# Altium PCB PowerSupply_REV1A.PcbDoc
Units mil, origin at the board's own origin, x right, y up, seen from the top; angles counter-clockwise.
Board outline 3935.5 x 3935.84 mil, 4 copper layers (SIG1, GND, PWR, SIG2), stack 78.468 mil thick; 61 components, 50 nets, 210 pads, 124 vias.
Unrouted connection lines stored in the file: 31.
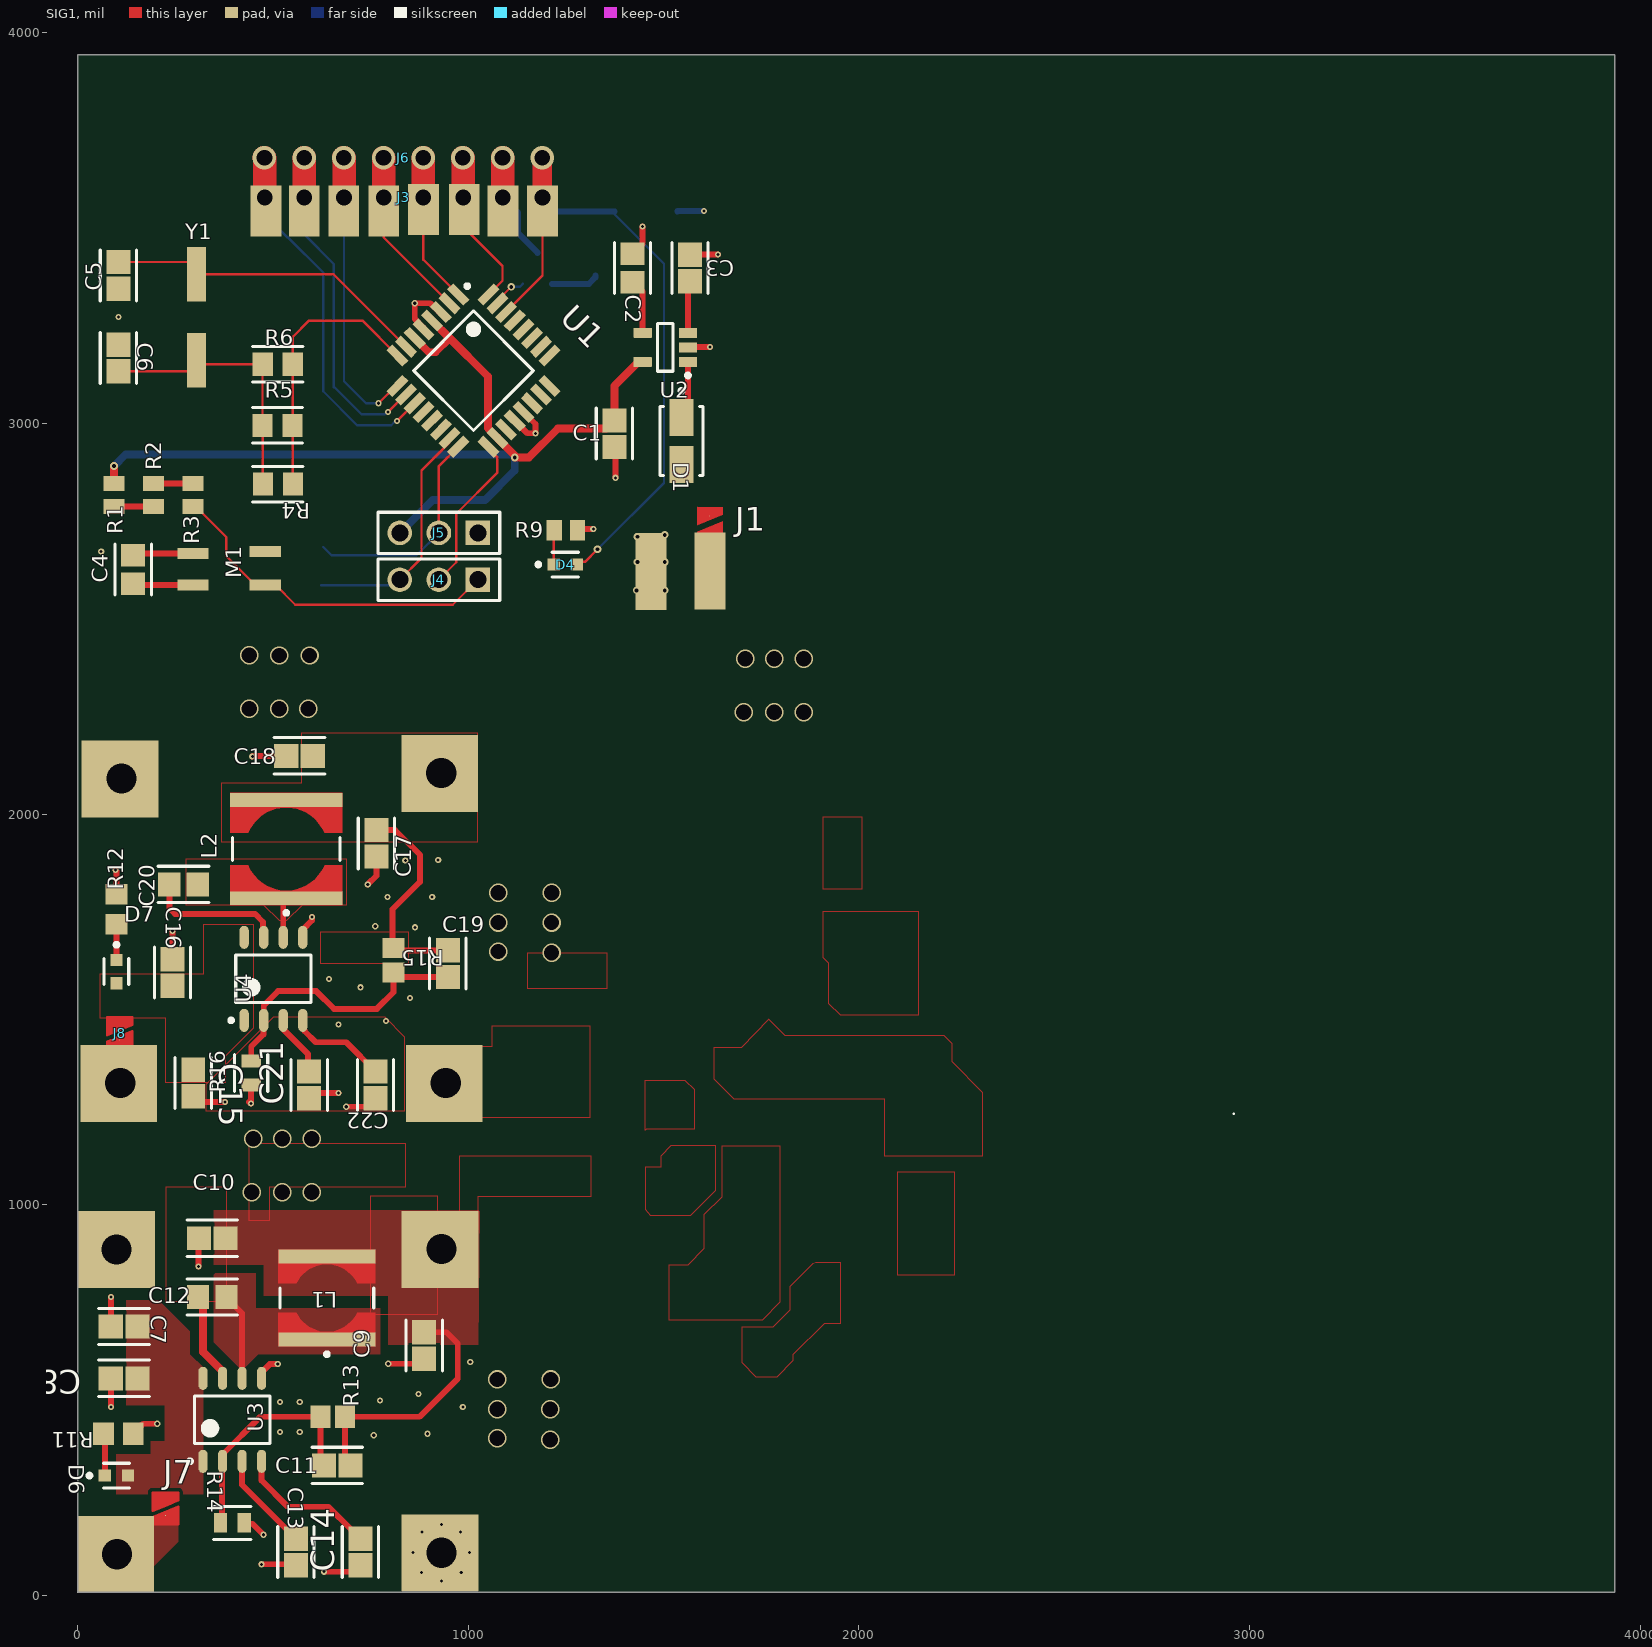
[diagram p0: SIG1 view]
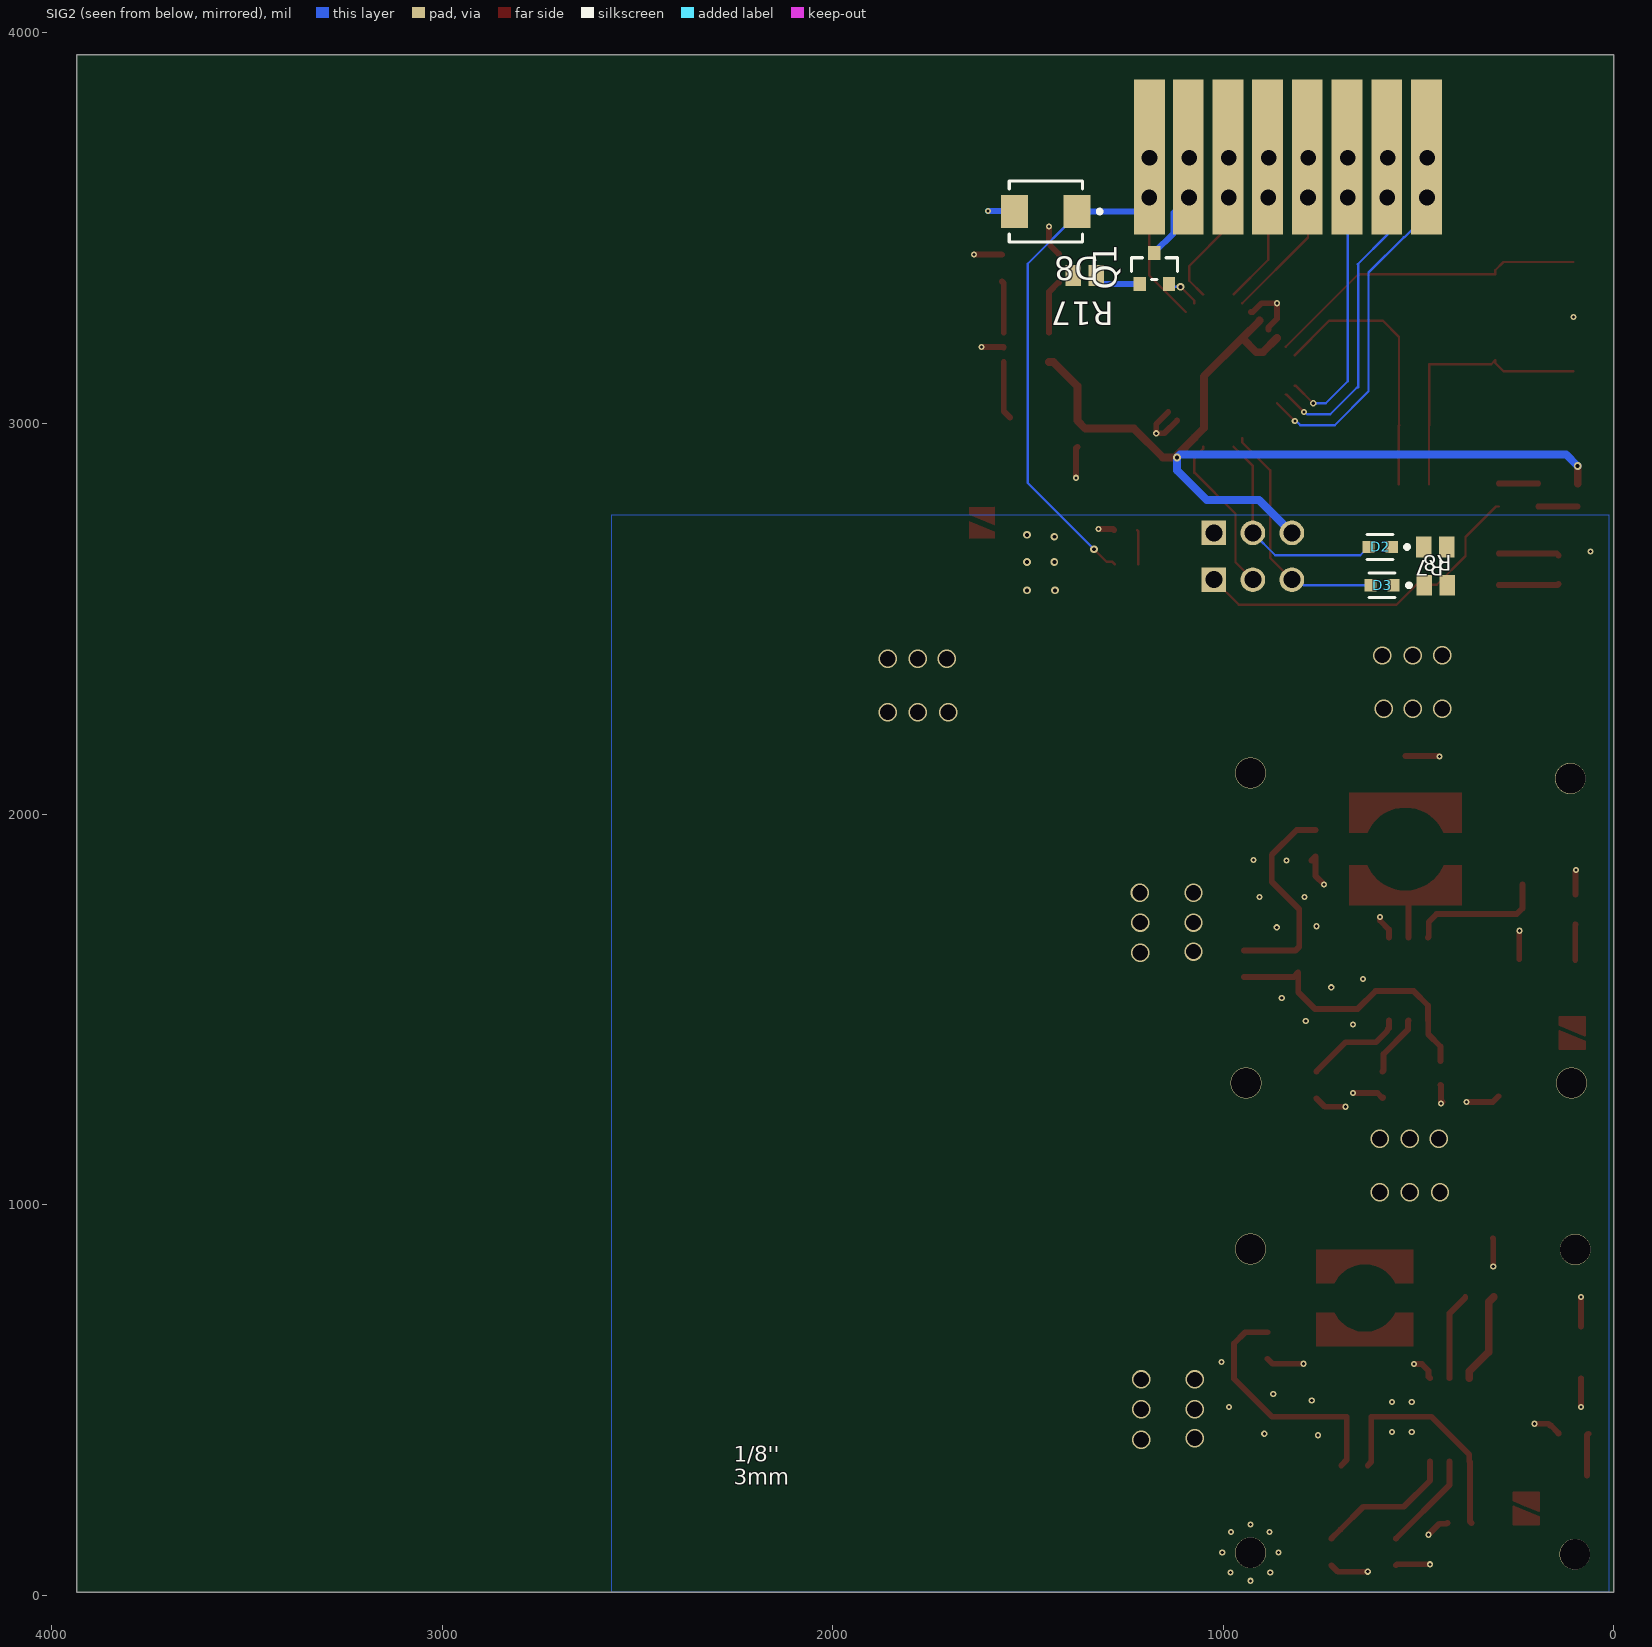
[diagram p1: SIG2 view, seen from below]
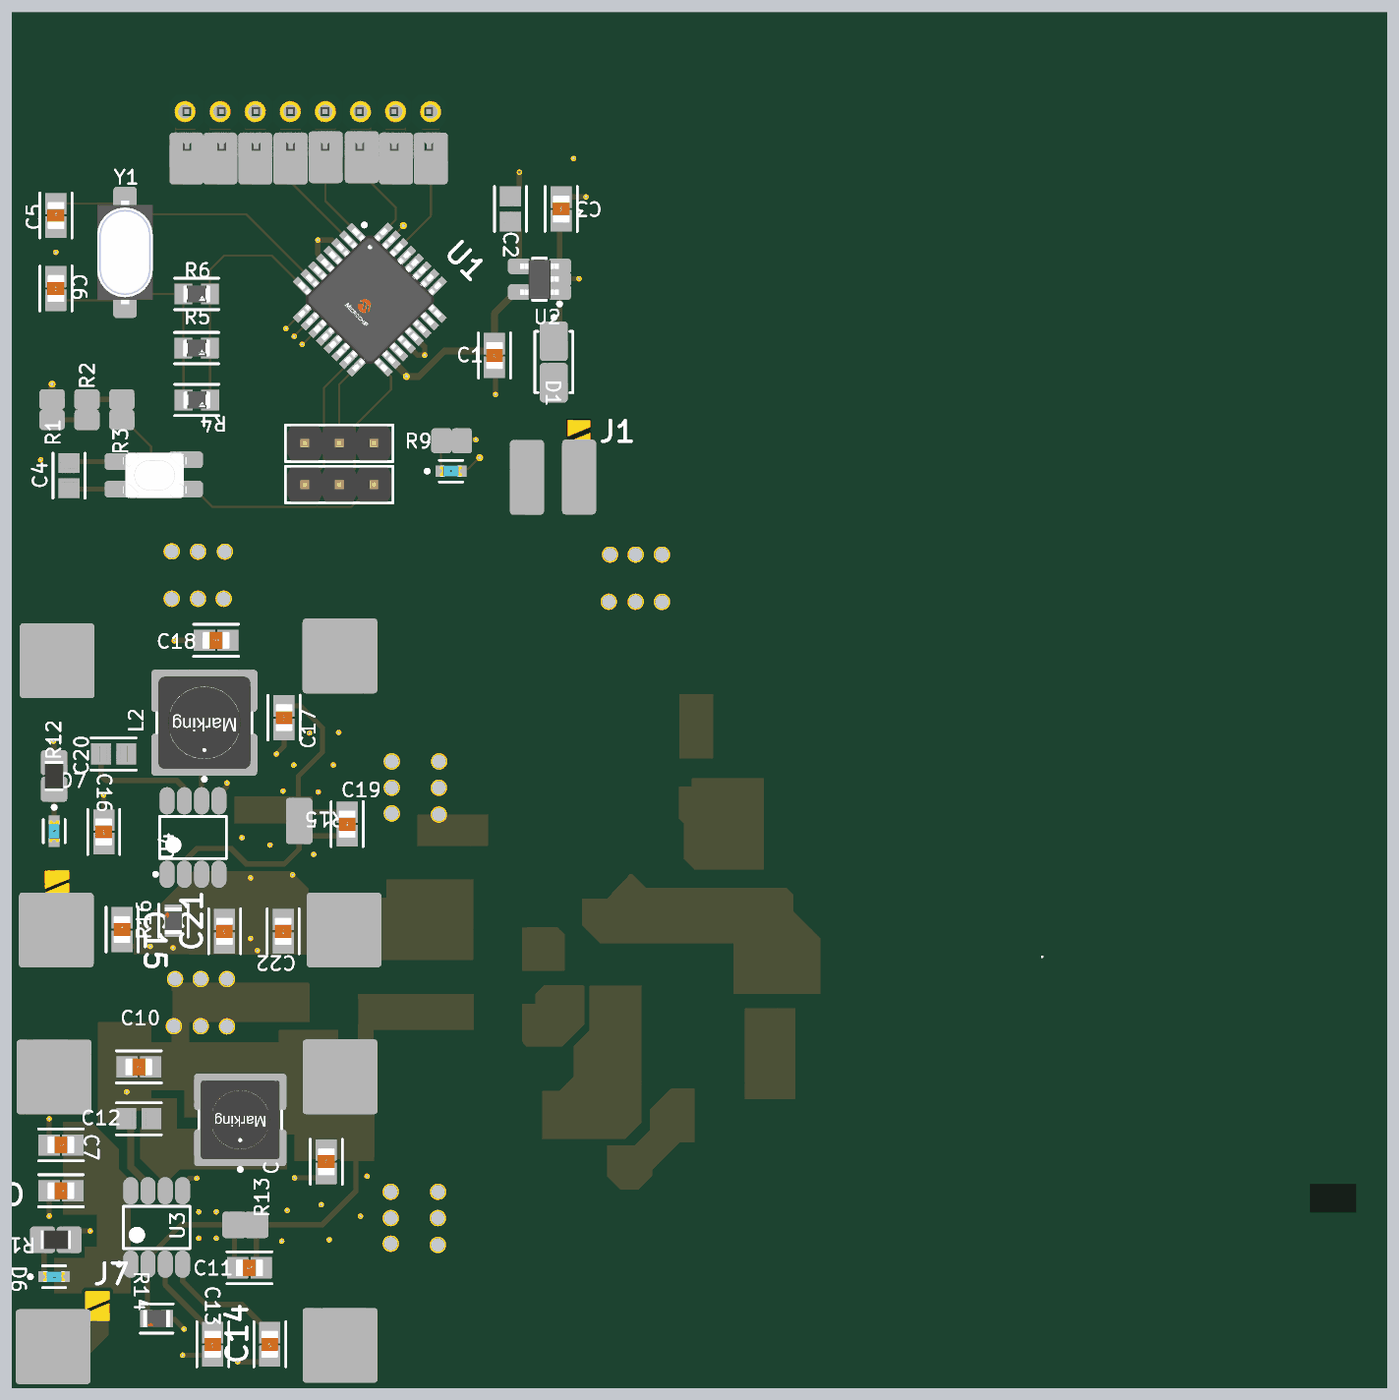
[diagram p2: 3D render of the assembled board from above, using the file's embedded part models]
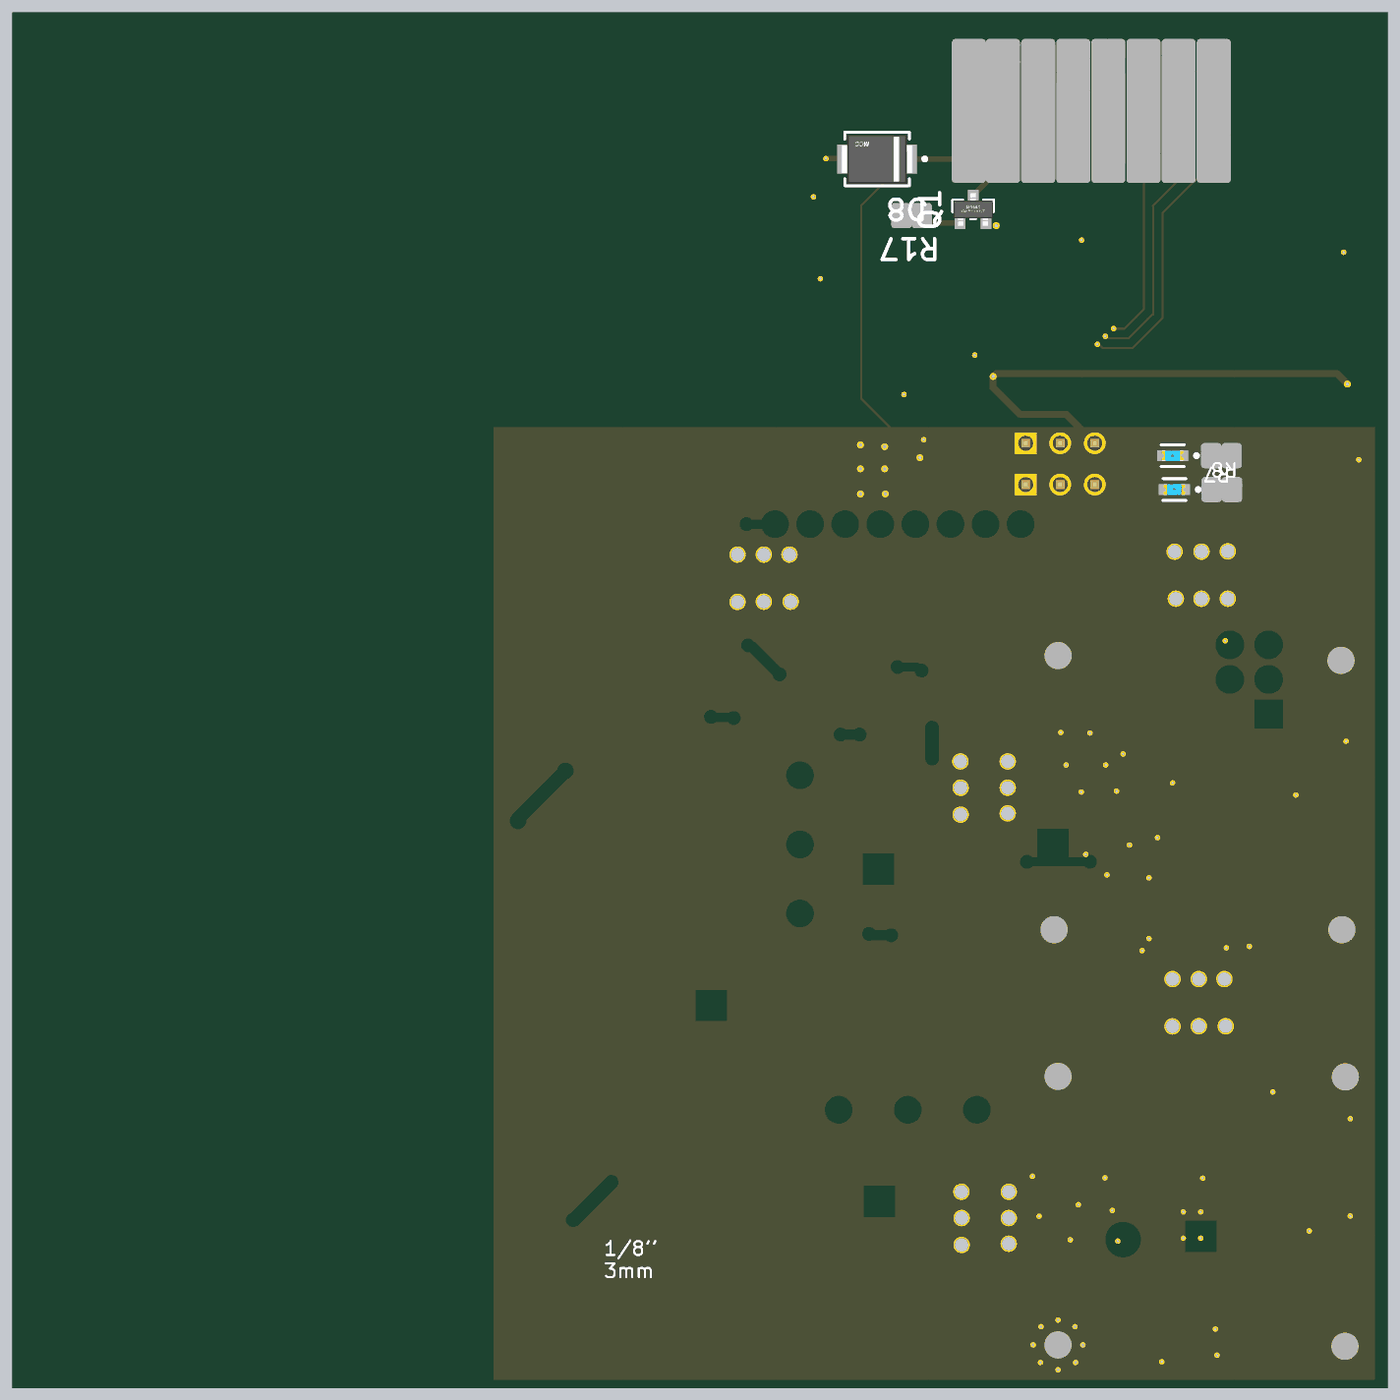
[diagram p3: 3D render of the assembled board from below, using the file's embedded part models]

## Layer stack, top to bottom
Top Solder: solder mask 0.5, Solder Resist, Dk 3.3
SIG1: signal copper 1.378
Dielectric 1: prepreg 2.8, PP-006, Dk 4.1
GND: signal copper 2.756
Dielectric 2: prepreg 2.8, PP-006, Dk 4.1
Dielectric1: core 59, FR-4, Dk 4.3
Dielectric 3: prepreg 2.8, PP-006, Dk 4.1
PWR: signal copper 2.756
Dielectric 4: prepreg 2.8, PP-006, Dk 4.1
SIG2: signal copper 1.378
Bottom Solder: solder mask 0.5, Solder Resist, Dk 3.3

## Board outline
0,8 0,3943.84 3935.5,3943.84 3935.5,8

## Design rules (kind name [scope] priority, off if disabled: settings)
Clearance [All] p1: gap=10 ignorepadtopadclearanceinfootprint=TRUE except(3.54: Arc-Arc Arc-Track Track-Track SMDPad-SMDPad; 5: Arc-SMDPad Track-SMDPad; 5.91: SMDPad-Text THPad-Text; 39.37: SMDPad-THPad THPad-THPad)
ComponentClearance FootprintClearance [HasFootprint('RESC1608X10N') vs HasFootprint('RESC1608X10N')] p1: gap=0 collisioncheckmode=3 verticalgap=1 showdistances=FALSE donotcheckwithout3dbody=TRUE
DiffPairsRouting [All] p1: maxlimit=50 minlimit=10 mostfreqgap=20 toplayer_minwidth=10 toplayer_maxwidth=10 toplayer_prefwidth=10 midlayer1_minwidth=10 midlayer1_maxwidth=10 midlayer1_prefwidth=10 midlayer2_minwidth=10 midlayer2_maxwidth=10 midlayer2_prefwidth=10 bottomlayer_minwidth=10 bottomlayer_maxwidth=10 bottomlayer_prefwidth=10 maxuncoupledlength=500
HoleSize [All] p1: absolutevalues=TRUE maxlimit=248.03 minlimit=7.87 maxpercent=80.000 minpercent=20.000
HoleToHoleClearance [All] p1: gap=20 allowstackedmicrovias=TRUE
MinimumAnnularRing [All] p1: minimumring=7.87
PasteMaskExpansion [All] p1: expansion=10
PlaneClearance [All] p1: clearance=15
PolygonConnect [All] p1: connectstyle=Direct reliefconductorwidth=19.68 reliefentries=4 polygonreliefangle="45 Angle" airgapwidth=19.68
RoutingVias [All] p1: holewidth=10 width=20 viastyle="Through Hole" minholewidth=10 minwidth=20 maxholewidth=10 maxwidth=20
SMDNeckDown [All] p1: percent=100.000
SilkToSolderMaskClearance SilkscreenOverComponentPads [IsPad] p1: minsilkscreentomaskgap=5.91 clearancetoexposedcopper=TRUE
SolderMaskExpansion [HasFootprint('No Footprint')] p1: expansion=1 istentingtop=FALSE
Width Width_1 [All] p1: maxlimit=80 minlimit=6 preferedwidth=20
23 further rules are at their usual default settings.

## Classes and differential pairs
component class Power_Distribution: C7 C8 C9 C10 C11 C12 C13 C14 C15 C16 C17 C18 C19 C20 C21 C22 D6 D7 J7 J8 L1 L2 R11 R12 R13 R14 R15 R16 U3 U4
component class uC_Environment: C1 C2 C3 C4 C5 C6 D1 D2 D3 D4 D8 J1 J3 J4 J5 M1 Q1 R1 R2 R3 R4 R5 R6 R7 R8 R9 R17 U1 U2 Y1

## Components (designator, comment, footprint, x,y, rotation, side; value= is the part's Value field where it differs from the comment)
C1 "C2012X5R1V226M125AC" FP-C2012-125-0_2-IPC_A 1374,2974 r270 top
C2 "CL21B104KBCNNNC" FP-CL21-IPC_A 1420.21,3397.98 r270 top
C3 "C2012X5R1V226M125AC" FP-C2012-125-0_2-IPC_A 1567.31,3397.98 r90 top
C4 "CL21B104KBCNNNC" FP-CL21-IPC_A 142,2626 r270 top
C5 "C2012X5R1V226M125AC" FP-C2012-125-0_2-IPC_A 104.08,3379.37 r270 top
C6 "C2012X5R1V226M125AC" FP-C2012-125-0_2-IPC_A 104.08,3168.01 r90 top
C7 "C2012X5R1V226M125AC" FP-C2012-125-0_2-IPC_A 118.75,688.28 r180 top
C8 "C2012X5R1V226M125AC" FP-C2012-125-0_2-IPC_A 118.75,555.48 r180 top
C9 "C2012X5R1V226M125AC" FP-C2012-125-0_2-IPC_A 886.99,639.44 r270 top
C10 "C2012X5R1V226M125AC" FP-C2012-125-0_2-IPC_A 344.33,914.01 r180 top
C11 "C2012X5R1V226M125AC" FP-C2012-125-0_2-IPC_A 664.46,332.48 r180 top
C12 "CL21B104KBCNNNC" FP-CL21-IPC_A 344.33,763.84 r0 top
C13 "C2012X5R1V226M125AC" FP-C2012-125-0_2-IPC_A 558.35,110.79 r90 top
C14 "C2012X5R1V226M125AC" FP-C2012-125-0_2-IPC_A 723.56,110.79 r90 top
C15 "C2012X5R1V226M125AC" FP-C2012-125-0_2-IPC_A 295.68,1311.74 r270 top
C16 "C2012X5R1V226M125AC" FP-C2012-125-0_2-IPC_A 242.73,1594.54 r90 top
C17 "C2012X5R1V226M125AC" FP-C2012-125-0_2-IPC_A 764.63,1925.25 r270 top
C18 "C2012X5R1V226M125AC" FP-C2012-125-0_2-IPC_A 567.96,2149.21 r180 top
C19 "C2012X5R1V226M125AC" FP-C2012-125-0_2-IPC_A 947.49,1617.2 r270 top
C20 "CL21B104KBCNNNC" FP-CL21-IPC_A 271.07,1820.04 r0 top
C21 "C2012X5R1V226M125AC" FP-C2012-125-0_2-IPC_A 592.54,1306.67 r90 top
C22 "C2012X5R1V226M125AC" FP-C2012-125-0_2-IPC_A 762.11,1306.67 r90 top
D1 "SMAJ30A-E3/61" VISH-DO-214AC-2_N 1546,2955 r270 top
D2 "LTST-C191TBKT" FP-LTST-C191TBKT-MFG 598.91,2683.88 r0 bottom
D3 "LTST-C191TBKT" FP-LTST-C191TBKT-MFG 593.85,2585.77 r0 bottom
D4 "LTST-C191TBKT" FP-LTST-C191TBKT-MFG 1248,2639 r0 top
D6 "LTST-C191TBKT" FP-LTST-C191TBKT-MFG 98.99,306.44 r0 top
D7 "LTST-C191TBKT" FP-LTST-C191TBKT-MFG 99.1,1596.73 r270 top
D8 "SMBJ5340B-TP" FP-DO-214AA-MFG 1454.8,3542.85 r0 bottom
J1 "JUMPER" JUMPER#1 1619,2742.21 r0 top
J3 "M22-2010805" M22-2010805-Footprint-1 1189.82,3578.85 r180 top
J4 "61300311121" 61300311121 924.58,2600.23 r180 top
J5 "61300311121" 61300311121 924.58,2719.89 r180 top
J6 "M22-2010805" M22-2010805-Footprint-1 1189.2,3680 r180 top (schematic designator J3)
J7 "JUMPER" JUMPER#2 225.01,218.55 r0 top
J8 "JUMPER" JUMPER#3 107.72,1436.16 r0 top
L1 "744052002" WE-TPC_5818 637.8,760.99 r180 top
L2 "744062003" WE-TPC_6823 533.94,1910.49 r180 top
M1 "PTS815SJK250SMTRLFS" PTS815SJK250SMTRLFS-Footprint-1 270,2567 r0 top
Q1 "DMP2004K-7" FP-SOT23-MFG 1176.8,3396.85 r90 bottom
R1 "ERA6AEB331V" RESC2013X60X40LL20T25 93,2817 r90 top
R2 "ERA6AEB331V" RESC2013X60X40LL20T25 194,2817 r270 top
R3 "ERA6AEB331V" RESC2013X60X40LL20T25 295,2817 r90 top
R4 "CRCW0805100RFKEAHP" FP-CRCW0805-HPe3-IPC_A 512.27,2844.96 r180 top
R5 "CRCW0805100RFKEAHP" FP-CRCW0805-HPe3-IPC_A 511.52,2995.25 r180 top
R6 "CRCW0805100RFKEAHP" FP-CRCW0805-HPe3-IPC_A 512.08,3151.98 r180 top
R7 "ERA6AEB331V" RESC2013X60X40LL20T25 457.84,2683.88 r0 bottom
R8 "ERA6AEB331V" RESC2013X60X40LL20T25 456.67,2585.77 r0 bottom
R9 "ERA6AEB331V" RESC2013X60X40LL20T25 1250,2727 r180 top
R11 "Resistor 1k +/-1% 0805 125 mW" RESC2013X70X40ML20T20 103.99,413.44 r180 top value=1k
R12 "Resistor 1k +/-1% 0805 125 mW" RESC2013X70X40ML20T20 98.96,1756.17 r270 top value=1k
R13 "RC0805FR-0775KL" RESC2014X05N 652.88,456.87 r0 top value=75kR
R14 "KTR10EZPF2202" FP-KTR10-IPC_C 395.75,185.44 r180 top
R15 "RC0805FR-07124KL" RESC2014X05N 808.49,1626.26 r90 top value=124kR
R16 "KTR10EZPF2202" FP-KTR10-IPC_C 444.14,1337.26 r90 top
R17 "ERA6AEB331V" RESC2013X60X40LL20T25 1354.8,3378.85 r0 bottom
U1 "ATMEGA168PB-AUR" FP-32A-MFG 1013.08,3135.37 r315 top
U2 "LP2985-50DBVR" DBV0005A_M 1504.32,3194.86 r180 top
U3 "BD9D321EFJ-E2" SOIC127P600X100-8N 395.75,449.18 r90 top
U4 "BD9D321EFJ-E2" SOIC127P600X100-8N 501.07,1578.18 r90 top
Y1 "ECS-160-20-3X-EN-TR" ECS-160-20-3X-EN-TR-Footprint-1 274.08,3457.37 r270 top

## Footprints (in the part's own frame and the unit in brackets; to place one, negate y for a bottom-side part, rotate by r counter-clockwise, add the part's x,y. Pads: shape width x height; smd on the part's side, far side on the other; paste and mask are expansions set on the pad)
61300311121 [mm] "Pin Header, pitch 2.54 mm, THT, Vertical, single row, 3p"
  rect 1.6x1.6 hole 1.1: 1(-2.54,0)
  round 1.6 hole 1.1: 2(0,0) 3(2.54,0)
  silkscreen extent -3.96,-1.35 3.96,1.35, body extent -3.81,-1.27 3.81,1.27, height 8.57
DBV0005A_M [mm] "SOT23, 5-Leads, Body 3.05x1.75mm, Pitch 0.95mm, IPC Low Density"
  rrect15% 1.2x0.65 smd: 1(-1.475,0.95) 2(-1.475,0) 3(-1.475,-0.95) 4(1.475,-0.95) 5(1.475,0.95)
  silkscreen extent -1.6,-1.55 0.5,1.95, body extent -1.42,-1.46 1.42,1.46, height 1.08
ECS-160-20-3X-EN-TR-Footprint-1 [mil]
  rect 140x48 smd: 1(295,30) 2(75,30)
  body extent 35,-51 335,111, height 91
FP-32A-MFG [mm]
  rect 1.5x0.55 smd paste+0 mask+0: 1(-4.2,2.8) 2(-4.2,2) 3(-4.2,1.2) 4(-4.2,0.4) 5(-4.2,-0.4) 6(-4.2,-1.2) 7(-4.2,-2) 8(-4.2,-2.8) 17(4.2,-2.8) 18(4.2,-2) 19(4.2,-1.2) 20(4.2,-0.4) 21(4.2,0.4) 22(4.2,1.2) 23(4.2,2) 24(4.2,2.8)
  rect 0.55x1.5 smd paste+0 mask+0: 9(-2.8,-4.2) 10(-2,-4.2) 11(-1.2,-4.2) 12(-0.4,-4.2) 13(0.4,-4.2) 14(1.2,-4.2) 15(2,-4.2) 16(2.8,-4.2) 25(2.8,4.2) 26(2,4.2) 27(1.2,4.2) 28(0.4,4.2) 29(-0.4,4.2) 30(-1.2,4.2) 31(-2,4.2) 32(-2.8,4.2)
  silkscreen extent -4.3,-2.75 2.75,3.72, body extent -5.05,-5.05 5.05,5.05, height 0.25
FP-C2012-125-0_2-IPC_A [mil]
  rect 62.13x61.27 smd paste+0 mask+0: 1(-34.02,0) 2(34.02,0)
  silkscreen extent -65,-46 65,46, body extent -85,-50 85,50, height 10
FP-CL21-IPC_A [mil]
  rect 57.27x61.27 smd paste+0 mask+0: 1(-36.45,0) 2(36.45,0)
  silkscreen extent -65,-46 65,46, body extent -85,-50 85,50, height 10
FP-CRCW0805-HPe3-IPC_A [mil]
  rect 51.42x59.38 smd paste+0 mask+0: 1(-38.43,0) 2(38.43,0)
  silkscreen extent -64,-45 64,45, body extent -84,-49 84,49, height 10
FP-DO-214AA-MFG [mil]
  rect 70x85 smd paste+0 mask+0: 1(-80,0) 2(80,0)
  silkscreen extent -143,-78 94,78, body extent -105,-71 105,71, height 95
FP-KTR10-IPC_C [mil]
  rect 33.79x49.69 smd paste+0 mask+0: 1(-30.59,0) 2(30.59,0)
  silkscreen extent -47,-42 47,42, body extent -51,-31 51,31, height 10
FP-LTST-C191TBKT-MFG [mm]
  rect 0.8x0.8 smd paste+0 mask+0: 1(-0.75,0) 2(0.75,0)
  silkscreen extent -1.87,-0.8 0.85,0.8, body extent -0.8,-0.4 0.8,0.4, height 0.65
FP-SOT23-MFG [mm]
  rect 0.9x0.8 smd paste+0 mask+0: 1(-1,0.95) 2(-1,-0.95) 3(1,0)
  silkscreen extent -0.7,-1.5 0.7,1.5, body extent -1.2,-1.45 1.2,1.45, height 1.11
JUMPER#1 [mil]
  round 1 smd paste-99999: 1(-0.5,-14.5) 2(-0.5,21.02)
  SIG1 region: -33,-2.95 32,24.05 32,44 -33,45
  SIG1 region: -33,-36 32,-37 32,8 -33,-19
JUMPER#2 [mil]
  round 1 smd paste-99999: 1(-0.5,-14.5) 2(-0.5,21.02)
  SIG1 region: -33,-36 32,-37 32,8 -33,-19
  SIG1 region: -33,-2.95 32,24.05 32,44 -33,45
  SIG1 lines w6: -33,-37 32,-37 32,8 -33,-19 -33,-37 ; -33,-2.95 3.21,12.09 32,24.05 32,40.09 32,44 -0.5,44 -33,44 -33,33.42 -33,21.02 -33,-2.95
JUMPER#3 [mil]
  round 1 smd paste-99999: 1(-0.5,-14.5) 2(-0.5,21.02)
  SIG1 region: -33,-36 32,-37 32,8 -33,-19
  SIG1 region: -33,-2.95 32,24.05 32,44 -33,45
  SIG1 lines w6: -33,-37 32,-37 32,8 -33,-19 -33,-37 ; -33,-2.95 32,24.05 32,44 -33,44 -33,-2.95
M22-2010805-Footprint-1 [mil]
  round 20 all layers, no hole: 1(0,0) 2(101.6,0) 3(203.2,0) 4(304.8,0) 5(406.4,0) 6(508,0) 7(609.6,0) 8(711.2,0)
  body extent -43,-49 755,49, height 337
PTS815SJK250SMTRLFS-Footprint-1 [mil]
  rect 80x28 smd: 0(25,100) 1(210,105) 2(25,20) 3(210,20)
  body extent 27,-5 213,125, height 98
RESC2013X60X40LL20T25 [mm] "Chip Resistor, 2-Leads, Body 2.00x1.25mm, IPC High Density"
  rect 1x1.35 smd: 1(-0.75,0) 2(0.75,0)
  body extent -1.1,-0.72 1.1,0.72, height 0.6
RESC2013X70X40ML20T20 [mm] "Chip Resistor, 2-Leads, Body 2.2x1.35mm, IPC Low Density"
  rect 1.35x1.45 smd: 1(-0.975,0) 2(0.975,0)
  body extent -1.1,-0.67 1.1,0.67, height 0.7
RESC2014X05N [mm] "Chip Resistor, 2-Leads, Body 2.00x1.35mm, IPC Medium Density"
  rect 1.3x1.45 smd: 1(-0.8,0) 2(0.8,0)
  body extent -1.1,-0.72 1.1,0.72, height 0.5
SOIC127P600X100-8N [mm] "SOIC, 8-Leads, Body 4.85x3.85mm, Pitch 1.27mm, IPC Medium Density"
  oval 1.5x0.6 smd: 1(-2.7,1.905) 2(-2.7,0.635) 3(-2.7,-0.635) 4(-2.7,-1.905) 5(2.7,-1.905) 6(2.7,-0.635) 7(2.7,0.635) 8(2.7,1.905)
  silkscreen extent -2.82,-2.45 1.55,2.88, body extent -1.95,-2.45 1.95,2.45, height 1
VISH-DO-214AC-2_N [mm] "DO-214AC, 2-Leads, Body 4.5x2.79mm, IPC Medium Density"
  rect 2.4x1.55 smd: 1(-1.525,0) 2(1.525,0)
  silkscreen extent -3.4,-1.4 2.25,1.4, body extent -2.25,-1.4 2.25,1.39, height 2.29
WE-TPC_5818 [mm] "Power Inductor, SMD, 2-Leads, body 5.8x5.8mm"
  rect 6.3x0.9 smd paste-403.566 mask-403.566: 1(0,2.7) 2(0,-2.7)
  SIG1 region: 3.15,-0.95 1.984,-0.95 1.984,-0.95 1.374,-1.718 0.491,-2.145 -0.49,-2.145 -1.374,-1.718 -1.984,-0.95 -1.984,-0.95 -3.15,-0.95 -3.15,-0.95 -3.15,-3.15 3.15,-3.15
  SIG1 region: -3.15,0.95 -1.984,0.95 -1.984,0.95 -1.374,1.718 -0.491,2.145 0.49,2.145 1.374,1.718 1.984,0.95 1.984,0.95 3.15,0.95 3.15,0.95 3.15,3.15 -3.15,3.15
  silkscreen extent -3.05,-0.65 3.05,3.77, body extent -2.9,-2.9 2.9,2.9, height 1.8
WE-TPC_6823 [mm] "Power Inductor, SMD, 2-Leads, body 6.8x6.8mm"
  rect 7.3x0.9 smd paste-403.566 mask-403.566: 1(0,3.2) 2(0,-3.2)
  SIG1 region: -3.65,1.05 -3.65,3.65 3.65,3.65 3.65,1.05 3.65,1.05 2.488,1.05 1.745,2.06 0.627,2.626 -0.627,2.626 -1.745,2.06 -2.488,1.05 -2.488,1.05 -2.488,1.05
  SIG1 region: 3.65,-1.05 3.65,-3.65 -3.65,-3.65 -3.65,-1.05 -3.65,-1.05 -2.488,-1.05 -1.745,-2.06 -0.627,-2.626 0.627,-2.626 1.745,-2.06 2.488,-1.05 2.488,-1.05 2.488,-1.05
  silkscreen extent -3.5,-0.75 3.5,4.27, body extent -3.4,-3.4 3.4,3.4, height 2.3

## Part data
C1 C3 C5 C6 C7 C8 C9 C10 C11 C13 C14 C15 C16 C17 C18 C19 C21 C22: library part CMP-2000-06038-3, "Multilayer Ceramic Capacitors 22μF ±20% 35V X5R SMD 0805", Capacitance=22uF, Case Code (Imperial)=0805, Case Code (Metric)=2012, Dielectric=X5R, Dielectric Material=Ceramic, Max Operating Temperature=85°C, Min Operating Temperature=-55°C, Package Quantity=2000, Tolerance=20%, Voltage Rating=35V, Case/Package=0805, Height=1.25mm, Lead Free="Lead Free", Length=0.079inch, Mount="Surface Mount", Packaging="Tape and Reel", REACH SVHC="No SVHC", RoHS Compliant=Yes, Series=C, Termination=SMD/SMT, Thickness=0.057inch, Voltage Rating (DC)=35V, Weight=0.000194oz, Width=0.049inch
C2 C4 C12 C20: library part CMP-2000-05017-2, "CL21 Series 0805 100nF 50V ±10% Tolerance X7R Multilayer Ceramic Chip Capacitor", Capacitance=100nF, Case Code (Imperial)=0805, Case Code (Metric)=2012, Dielectric=X7R, Max Operating Temperature=125°C, Min Operating Temperature=-55°C, Tolerance=10%, Voltage=50V, Case/Package=0805, Contact Plating=Tin, Depth=1.25mm, Height=0.85mm, Lead Free="Lead Free", Length=2mm, Material=Ceramic, Mount="Surface Mount", Packaging="Tape and Reel", Radiation Hardening=No, Thickness=0.037inch, Voltage Rating=50V, Voltage Rating (DC)=50V, Width=0.049inch
D1: library part CMP-0548-00228-2, "Transient Voltage Suppressor, 6.40 to 231 V, 30 V Stand-off Voltage, Uni-Directional, -55 to 155 degC, 2-pin DO-214AC, Pb-Free, Tape and Reel", Manufacturer="Vishay Semiconductor", Operating Junction and Storage Temperature Range="-55 to 150 degC", ComponentLink1Description="Manufacturer URL", ComponentLink1URL=http://www.vishay.com/, ComponentLink2Description=Datasheet, ComponentLink2URL=http://www.vishay.com/docs/88390/smaj50a.pdf, ComponentLink3Description="Package Specification", ComponentLink3URL=http://www.vishay.com/docs/88390/smaj50a.pdf, DatasheetVersion=12/8/2013, ID (uA)=1, IFSM="40 A", Mounting Technology="Surface Mount", PackageDescription="2-Pin DO-214AC (SMA), Body 4.245 x 2.665 mm", PackageReference=DO-214AC-2, Packing="Tape and Reel", PartNumber=SMAJ30A-E3/61, PPPM (W)="400, 300", RoHS=TRUE, VBR Uni-Directional (V)="6.4 to 231", VWM (V)=30
D2 D3 D4 D6 D7: library part CMP-22017-000008-1, "LED BLUE CLEAR CHIP SMD", Case Code (Imperial)=0603, Case Code (Metric)=1608, Color=Blue, Forward Current=20mA, Forward Voltage=3.8V, Lens Color=Colorless, Max Operating Temperature=80°C, Max Power Dissipation=75mW, Min Operating Temperature=-20°C, Package Quantity=1, Power Dissipation=76mW, Reverse Voltage=5V, Case/Package=0603, Depth=1.6mm, Dominant Wavelength=475nm, Height=0.55mm, Illumination Color=Blue, Lead Free="Lead Free", Length=0.8mm, Lens Style=Diffused, Lens Transparency=Clear, Luminous Intensity=180mcd, Mount="Surface Mount", Number of Elements=1, Number of LEDs=1, Number of Pins=2, Packaging="Tape and Reel", Radiation Hardening=No, Test Current=20mA, Viewing Angle=130°, Wavelength=468nm, Width=0.8mm
D8: library part CMP-56208-000001-1, "DIODE ZENER 6V 5W DO214AA", Forward Current=1A, Manufacturer="Micro Commercial Components", Max Junction Temp=+150°C, Max Reverse Leakage Current=1uA, Nom Zener Voltage=6V, Package=DO-214AA, Power Dissipation=5W, Temperature="-55°C to +150°C", Temperature Range Low=-55°C, Automotive=No, Category=Diode, ComponentLink2Description=Datasheet, ComponentLink2URL=https://www.mccsemi.com/pdf/Products/SMBJ5338B-SMBJ5388B%28SMB%29.pdf, Device Class L1="Discrete Semiconductors", Device Class L2=Diodes, Device Class L3="Zener Diodes", Digikey Description="DIODE ZENER 6V 5W DO214AA", Height=2.41mm, Lead Free=Yes, Manufacturer Part Number=SMBJ5340B-TP, Mouser Description="SMBJ Series 5 W 6 V 1 A Zener Diode-DO-214AA", Octopart=https://octopart.com/smbj5340b-tp-mcc-19246153, RoHS=TRUE, Standoff Height=0.05mm, Temperature Range High=+150°C, Zener Impedance=1Ω
J1 J7 J8: library part CMP-009-00061-4, Pins=2
J3 J6: library part CMP-002-00071-2, "Connector, Header, 8Pos, 1Row, 2Mm Rohs Compliant: Yes", Case/Package=SIL, Contact Finish - Mating=GOLD, Contact Material=Bronze, Contact Plating=Gold
J4 J5: library part CMP-1502-01062-1, "THT Vertical Pin Header WR-PHD, Pitch 2.54 mm, Single Row, 3 pins", Contact Resistance=20mOhm, Manufacturer="Wurth Elektronik", Operating Temperature=-40to105degC, Rated Current=3A, Withstanding Voltage=500VAC, Working Voltage=250VAC, Datasheet URL=https://katalog.we-online.de/em/datasheet/6130xx11121.pdf, Gender=Male, Manufacturer URL=http://www.we-online.de, Mounting Technology=THT, Orientation=Vertical, Package Reference=61300311121, Packaging=Bag, Part Number=61300311121, Pin Number=3, Pitch=2.54mm, Publisher=WurthElektronik, Row Number=Single
L1: library part CMP-0227-00410-3, Ambient Temperature Range High=95°C, Ambient Temperature Range Low=-40°C, Current Rating=2.4A, DC Resistance (DCR)=30mΩ, Inductance=2.5µH, Inductance Tolerance=30%, Max Operating Temperature=125°C, Self Resonant Frequency=85MHz, Height=1.8mm, Length=5.8mm, Min Operating Temperature=-40°C, NexarPartId=22866863, Number of Pins=2, Packaging="Cut Tape (CT)", RoHS=Compliant, Width=5.8mm
L2: library part CMP-0227-00249-3, Ambient Temperature Range High=95°C, Ambient Temperature Range Low=-40°C, Case Code (Imperial)=2727, Case Code (Metric)=6868, Current Rating=2.8A, DC Resistance (DCR)=20mΩ, Inductance=3.3µH, Inductance Tolerance=30%, Max Operating Temperature=125°C, Saturation Current=2.5A, Self Resonant Frequency=55MHz, Test Frequency=100kHz, Case/Package=2727, Composition=Wirewound, Core Material=Ferrite, Height=2.3mm, Height - Seated (Max)=2.4892mm, Lead Free="Lead Free", Length=6.8mm, Max DC Current=2.8A, Min Operating Temperature=-40°C, Mount="Surface Mount", NexarPartId=24533145, Number of Pins=2, Packaging="Tape & Reel (TR)", REACH SVHC=Unknown, RMS Current (Irms)=2.8A, RoHS=Compliant, Shielding=Shielded, Termination=SMD/SMT, Tolerance=30%, Width=6.8mm
M1: library part CMP-011-00013-2, "Switch Tactile N.O. SPST Button J-Bend 0.05A 12VDC 2.45N SMD T/R", Max Operating Temperature=70°C, Min Operating Temperature=-20°C, Illumination Type=Non-Illuminated, Mechanical Life=50000Cycles
Q1: library part CMP-12801-000029-1, "MOSFET P-CH 20V 600MA SOT23-3", Continuous Drain Current=-600mA, Drain To Source Breakdown Voltage=-20V, Drain To Source Resistance=1.1Ω, Gate To Source Voltage=8V, Input Capacitace At Vds="175pF @ -16V", Manufacturer="Diodes Inc.", Max Forward Diode Voltage=-1.2V, Max Junction Temp=+150°C, Package=SOT23, Power Dissipation=550mW, Pulse Drain Current=-1.9A, Temperature="-55°C to +150°C", Temperature Range Low=-55°C, Automotive=No, Category=Trans, ComponentLink2Description=Datasheet, ComponentLink2URL=https://www.diodes.com/assets/Datasheets/ds30933.pdf, Depletion Mode=False, Device Class L1="Discrete Semiconductors", Device Class L2=Transistors, Device Class L3=MOSFETs, Digikey Description="MOSFET P-CH 20V 600MA SOT23-3", Drain To Source Voltage=-20V, Footprint Url=https://www.diodes.com/assets/Package-Files/SOT23.pdf, Height=1.1mm, Lead Free=Yes, Manufacturer Part Number=DMP2004K-7, Mouser Description="MOSFET P-Channel", Number Of Channels=1, Number Of P Channels=1, Octopart=https://octopart.com/dmp2004k-7-diodes+inc.-7151877, RoHS=TRUE, Rthja Max=227°C/W, Standoff Height=0.013mm, Temperature Range High=+150°C, Threshold Vgs Max=-1V, Threshold Vgs Min=-0.5V, Turn Off Delay Time=20.2ns, Turn On Delay Time=8.5ns
R1 R2 R3 R7 R8 R9 R17: library part CMP-2001-00628-1, Manufacturer=Panasonic, Part Number=ERA6AEB331V
R4 R5 R6: library part CMP-02407-011702-1, "RES Thick Film, 100Ω, 1%, 0.5W, 100ppm/°C, 0805", Case Code (Imperial)=0805, Case Code (Metric)=2012, Max Operating Temperature=155°C, Max Power Dissipation=500mW, Min Operating Temperature=-55°C, Package Quantity=5000, Power Rating=330mW, Resistance=100R, Resistance Tolerance=1%, Resistor Type="Thick Film", Temperature Coefficient=100ppm/°C, Voltage Rating=150V, Case/Package=0805, Construction=Rectangular, Contact Plating=Tin, Depth=1.25mm, Features="Automotive AEC-Q200", Height=0.5mm, Lead Free="Lead Free", Length=2mm, Military Standard=Not, Mount="Surface Mount", Number of Terminations=2, Packaging="Tape and Reel", Radiation Hardening=No, RoHS Compliant=Yes, Series=CRCW-HP, Technology="THICK FILM", Termination=SMD/SMT, Tolerance=1%, Voltage Rating (DC)=150V, Weight=0.000194oz, Width=1.2mm
R11 R12: library part CMP-009-00010-5, "Chip Resistor, 1 KOhm, +/- 1%, 0.125 W, -55 to 155 degC, 0805 (2013 Metric)", Case/Package=0805, Max Operating Temperature=155°C, Min Operating Temperature=-55°C, Power=125mW, Tolerance=1%, Voltage Rating=150V, Mounting Technology=SM, Pins=2, RoHS Compliant=True
R13: library part CMP-009-00179-1, "Res Thick Film 0805 75K Ohm 1% 0.125W(1/8W) ±100ppm/C Pad SMD T/R", Case Code (Imperial)=0805, Case Code (Metric)=2012, Max Operating Temperature=155°C, Max Power Dissipation=125mW, Min Operating Temperature=-55°C, Package Quantity=1, Temperature Coefficient=100ppm/°C, Tolerance=1%, Voltage Rating=150V, Case/Package=0805, Construction=Rectangular, Depth=1.25mm, Features="Moisture Resistant", Height=0.5mm, Lead Free="Lead Free", Length=2mm, Military Standard=Not, Mounting Technology="Surface Mount", Number of Terminations=2, Packaging="Tape and Reel", Power Rating=125mW, RoHS Compliant=Yes, Series=RC, Technology="THICK FILM", Termination=SMD/SMT, Voltage Rating (DC)=150V, Width=0.049inch
R14 R16: library part CMP-08839-031359-1, "Res Thick Film 0805 22kΩ 1% 0.125W ±100ppm/°C Automotive Paper T/R", Case Code (Imperial)=0805, Case Code (Metric)=2012, Max Operating Temperature=155°C, Max Power Dissipation=125mW, Min Operating Temperature=-55°C, Package Quantity=5000, Resistance=22kR, Resistor Type="Thick Film", Temperature Coefficient=100ppm/°C, Tolerance=1%, Case/Package=0805, Features="Automotive AEC-Q200", Height=0.026inch, Lead Free="Lead Free", Length=0.079inch, Number of Terminations=2, Packaging="Tape and Reel", RoHS Compliant=Yes, Series=KTR, Width=0.049inch
R15: library part CMP-009-00180-1, "Res Thick Film 0805 124K Ohm 1% 1/8W ±100ppm/°C SMD Paper T/R", Case Code (Imperial)=0805, Case Code (Metric)=2012, Max Operating Temperature=155°C, Max Power Dissipation=125mW, Min Operating Temperature=-55°C, Package Quantity=1, Temperature Coefficient=100ppm/°C, Tolerance=1%, Voltage Rating=150V, Case/Package=0805, Contact Plating=Tin,Lead, Features="Moisture Resistant", Height=0.024inch, Lead Free="Lead Free", Length=0.079inch, Number of Terminations=2, Packaging="Tape and Reel", Power Rating=125mW, RoHS Compliant=Yes, Series=RC, Termination=SMD/SMT, Voltage Rating (DC)=150V, Width=0.049inch
U1: library part CMP-06276-000190-1, "IC MCU 8BIT 16KB FLASH 32TQFP", RoHS Compliant=Yes
U2: library part CMP-0758-00084-2, "Single Output Low Noise LDO, 150 mA, Fixed 5 V Output, 1.5% Tolerance, 2.2 to 16 V Input, Low IQ, 5-Pin SOT-23 (DBV), -40 to 125 degC, Green (RoHS & no Sb/Br), Tape and Reel", Manufacturer="Texas Instruments", Operating Temperature Range (degC)="-40 to 125", Accuracy (%)=1.5, ComponentLink1Description="Manufacturer URL", ComponentLink1URL=http://www.ti.com/, ComponentLink2Description=Datasheet, ComponentLink2URL=http://www.ti.com/lit/ds/symlink/lp2985-50.pdf, ComponentLink3Description="Package Specification", ComponentLink3URL=http://www.ti.com/litv/pdf/mpds018j, DatasheetVersion=SLVS522N, Fixed Output Options (V)=5, Iout (Max) (A)=0.15, Iq (Typ) (mA)=0.85, Mounting Technology="Surface Mount", Output Options="Fixed Output", PackageDescription="5-Pin Plastic Small Outline, Body 2.9 x 1.6 mm, Pitch 0.95 mm", PackageReference=DBV0005A, PackageVersion=4073253-4/L, Packing="Tape and Reel", PartNumber=LP2985-50DBVR, RoHS=TRUE, Vdo (Typ) (mV)=280, Vin (V)="2.2 to 16"
U3 U4: library part CMP-019-00049-1, "ICREGBUCKADJ3ASYNC8HTSOP", Max Operating Temperature=85°C, Max Output current=3A, Max Output Voltage=7V, Max Supply Voltage=18V, Min Input Voltage=4.5V, Min Operating Temperature=-40°C, Min Output Voltage=765mV, Package Quantity=2500, Switching Frequency=700kHz, Lead Free="Lead Free", Min Supply Voltage=4.5V, Mounting Technology="Surface Mount", Number of Outputs=1, Operating Supply Voltage=18V, Output Configuration=Positive, Output Current=3A, Output Type=Adjustable, Output Voltage=7V, Packaging="Tape and Reel", Pins=8, Reach SVHC Compliant=Unknown, RoHS Compliant=Yes, Series=-, Synchronous Rectifier=Yes
Y1: library part CMP-003-00030-1, "Crystal 16MHz ±30ppm (Tol) ±50ppm (Stability) 20pF FUND 50Ohm 2-Pin HC-49/USX SMD T/R", ESR (Equivalent Series Resistance)=50R, Frequency=16MHz, Frequency Stability=50ppm, Frequency Tolerance=30ppm

## Free pads (board coordinates)
  rect 196.85x196.85 smd: Mount(96.21,103.91) Mount(98.99,885.01) Mount(105.08,1310.29) Mount(107.72,2090.09) Mount(926.7,2103.93) Mount(926.99,108.01) Mount(926.99,885.48) Mount(938.45,1310.29)
  rect 78.74x396.85 smd far side: Pad(480,3682) Pad(581.71,3682) Pad(683.43,3682) Pad(785.14,3682) Pad(886.86,3682) Pad(988.57,3682) Pad(1090.29,3682) Pad(1189,3682)
  rect 78.74x130 smd: Pad(482.14,3544) Pad(580.22,3544) Pad(681.2,3544) Pad(783.42,3544) Pad(885.02,3548) Pad(989.82,3548) Pad(1088.82,3544) Pad(1189.82,3544)
  rect 78.74x196.85 smd: Pad(1468,2621) Pad(1619,2622)

## Via types
v1: diameter 15.75, hole 7.87, SIG1 to SIG2, 60 vias
v2: diameter 47.24, hole 39.37, SIG1 to SIG2, 30 vias
v3: diameter 60, hole 40, SIG1 to SIG2, 16 vias
v4: diameter 20, hole 10, SIG1 to SIG2, 10 vias
v5: diameter 78.74, hole 77.36, SIG1 to SIG2, 8 vias

## Nets (pads, with @x,y where several pads share a name; then routed paths per layer and width w, separated by ;. In a path a pad name is that pad's centre, name@x,y a point inside that pad or via, vN(x,y) a via of type N, cw(c..) or ccw(c..) an arc to the next point about the centre after c; other vN are vias at no path point)
3V3_EN: C7.1 C8.1 D6.2 J7.2 U3.1 U3.8
3V3_smps: C9.1 C10.1 C11.1 L1.2 pad.Mount@926.99,885.48 R13.2 | length 647.5
  SIG1 w15: C11.1 684.37,346.58 R13.2 875.39,456.87 972.99,554.46 972.99,644.82 944.35,673.46 C9.1
  other v5: 930.98,886.57
5V0: 
5V0_EN: C15.1 C16.1 D7.2 J8.2 U4.1 U4.8
5V0_reg: C1.1 J5.3 R1.2 U1.4 U1.6 U1.18 U2.5 | length 2517.1
  SIG1 w20: R1.2 v4(93,2890.98) ; U1.6 899.01,3182.63 915.58,3182.63 951.83,3218.89 ; U1.4 951.83,3218.89 ; U2.5 1435.42,3157.46 1374,3096.04 C1.1 1374,3007.59 1353.37,2986.95 1228.95,2986.95 1155.26,2913.26 v4(1118.87,2913.26) 1118.87,2918.23 U1.18 1074.32,2963.94 1050,2988.27 1050,3120.72 951.83,3218.89
  SIG2 w20: v4(93,2890.98) 123.02,2921 1111.12,2921 v4(1118.87,2913.26) 1118.87,2879.95 1042.91,2804 908.69,2804 J5.3
5V_smps: C17.1 C18.1 C19.1 J1.1 L2.2 pad.Mount@926.7,2103.93 pad.Pad@1619,2622 R15.2 | length 547.5
  SIG1 w15: C17.1 812.43,1959.27 876.12,1895.59 876.12,1826.45 805.97,1756.3 805.97,1660.28 R15.2 815.04,1651.21 C19.1
  other v5: 930.69,2105.02
5V_smps_EN: 
12Vin: 
FB_3V3: C11.2 R13.1 R14.2 U3.2 | length 596.1
  SIG1 w15: R14.2 369.1,189.38 369.1,341.23 U3.2 370.75,360.6 467.02,456.87 R13.1 621.38,341.53 C11.2
FB_5V: C19.2 R15.1 R16.2 U4.2 | length 734
  SIG1 w15: R16.2 444.14,1404.75 475.55,1436.16 475.55,1471.37 U4.2 476.07,1510.04 512.82,1546.79 610.59,1546.79 655.97,1501.41 765.86,1501.41 808.49,1544.05 R15.1 820.08,1583.18 C19.2
GND: C1.2 C2.1 C3.2 C4.1 C5.2 C6.2 C7.2 C8.2 C9.2 C10.2 C13.1 C14.1 C15.2 C16.2 C17.2 C18.2 C21.1 C22.1 D8.2 J5.1 M1.0 pad.Mount@98.99,885.01 pad.Mount@107.72,2090.09 pad.Mount@926.99,108.01 pad.Mount@938.45,1310.29 pad.Pad@1468,2621 R7.1 R8.1 R9.1 R11.1 R12.1 R14.1 R16.1 R17.2 U1.3 U1.5 U1.20 U1.21 U2.2 U3.5 U4.5 | length 2238.9
  SIG1 w15: v1(84.73,482.42) C8.2 ; C7.2 v1(84.73,763.84) ; v1(96.93,1856.88) 96.93,1856.68 98.96,1854.65 R12.1 ; C4.1 146.55,2667 M1.0 ; R11.1 142.37,415.41 161.45,434.49 163.42,434.49 167.97,439.04 v1(203.51,439.04) ; v1(242.29,1701.34) 242.29,1701.13 242.73,1700.7 C16.2 ; C15.2 310.36,1263.05 v1(377.2,1263.05) ; v1(309.22,841.7) 309.22,912.92 C10.2 ; R14.1 428.7,183.09 447.17,183.09 v1(475.33,154.93) ; v1@438.79,1263.05 443.12,1258.71 v1(443.32,1258.71) 443.32,1305.85 R16.1 ; v1(446.89,2147.93) 447.09,2147.93 448.37,2149.21 C18.2 ; v1(470.75,79.29) 555.84,79.29 C13.1 ; U3.5 474.74,559.46 474.74,574.85 491.54,591.65 511.83,591.65 v1(511.97,591.8) ; U4.5 576.07,1704.16 599.35,1727.44 599.35,1736.05 v1(599.49,1736.2) ; C21.1@591.01,1274.18 C21.1 605.73,1285.84 v1(667.8,1285.84) v1@667.8,1285.64 ; v1(630.44,60.29) 707.08,60.29 C14.1 ; v1@687.31,1250.89 v1(687.45,1250.75) 740.21,1250.75 C22.1 ; v1(742.43,1820.04) 764.63,1842.25 C17.2 C17.2@774.91,1880.96 ; v1(794.99,592.68) 874.25,592.68 C9.2 ; U1.5 885.02,3245.87 862.75,3268.14 v1(862.75,3307.98) 902.59,3307.98 924.86,3285.7 U1.3 ; U1.20 1151.18,2975 v1(1172,2975) 1172,2998.72 U1.21 ; R9.1 1282.53,2730 v1(1320,2730) ; C1.2 1377,2936.98 v1(1377,2861) ; C2.1 1422.21,3434.43 1443.35,3455.56 1443.35,3457.56 1446.25,3460.46 v1(1446.25,3504.38) ; U2.2 1563.39,3195.86 1618.86,3195.86 v1(1619,3196) ; C3.2 1568.31,3433 v1(1639,3433)
  SIG2 w15: D8.2 1535.95,3544 v1(1603,3544)
  other v1: 930.98,36.98 880.04,58.04 981.91,58.05 858.86,109.1 1003.09,109.1 881.76,161.81 980.19,161.81 930.98,181.21 757.88,409.58 895.33,413.44 517.72,417.95 568.32,417.95 985.89,481.73 517.72,494.44 568.32,494.44 773.88,498.58 872.33,515.02 1004.99,597.44 667.8,1461.4 789.24,1470.23 850.6,1529.46 724,1556.53 642.86,1577.83 863.49,1710.2 761.68,1712.86 792.82,1788.2 907.49,1788.2 838.62,1880.96 922.89,1882.4 60,2672 104.08,3273
  other v4: 1431,2573 1503,2573 1433,2645.76 1503,2645.76 1433,2710 1503,2715
  other v5: 930.98,109.1 98.99,885.01 942.44,1311.38 111.71,2091.18
MISO: D3.2 J4.3 U1.15 | length 622.4
  SIG1 w6: J4.3 880.08,2655.73 880.08,2879.95 951.83,2951.7 U1.15
  SIG2 w6: D3.2 794.7,2585.77 809.16,2600.23 J4.3
MOSI: D2.2 J5.2 U1.16 | length 569.8
  SIG1 w6: J5.2 924.58,2890.98 U1.16
  SIG2 w6: D2.2 649.68,2662.65 867.34,2662.65 J5.2
NetC2_2: C2.2 U2.4 | length 141.2
  SIG1 w15: C2.2 1422.21,3361.53 1446.25,3337.5 U2.4
NetC3_1: C3.1 D1.1 U2.1 U2.3 | length 282.9
  SIG1 w15: D1.1 1562.39,3031.43 U2.1 ; U2.3 1562.39,3359.04 C3.1
NetC4_2: C4.2 M1.2 | length 154.1
  SIG1 w15: C4.2 144.55,2587 M1.2
NetC12_1: C12.1 U3.7 | length 234.4
  SIG1 w20: C12.1 320.75,750.97 320.75,623.2 370.75,573.2 U3.7
NetC13_2: C13.2 U3.3 | length 255.1
  SIG1 w15: U3.3 420.75,282.84 558.35,145.24 C13.2
NetC14_2: C14.2 U3.4 | length 363.8
  SIG1 w15: U3.4 470.75,293.91 537.98,226.68 641.69,226.68 699.99,168.38 700.42,168.38 723.56,145.24 C14.2
NetC20_1: C20.1 U4.7 | length 355.7
  SIG1 w15: C20.1 234.63,1758.52 249.09,1744.06 454.16,1744.06 474.42,1723.81 474.42,1686.13 U4.7
NetC21_2: C21.2 U4.3 | length 158.7
  SIG1 w15: U4.3 527.72,1470.23 527.72,1447.7 589.95,1385.47 589.95,1343.28 C21.2
NetC22_2: C22.2 U4.4 | length 254.1
  SIG1 w15: U4.4 576.07,1451.83 580.38,1447.52 580.38,1444.58 609.18,1415.78 687.45,1415.78 762.11,1341.12 C22.2
NetD1_2: D1.2 J1.2
NetD2_1: D2.1 R7.2
NetD3_1: D3.1 R8.2
NetD4_1: D4.1 R9.2 | length 88.8
  SIG1 w6: D4.1 1218.47,2725 R9.2
NetD5_1: 
NetD6_1: D6.1 R11.2 | length 108.6
  SIG1 w15: R11.2 69.46,409.58 D6.1
NetD7_1: D7.1 R12.2 | length 91.6
  SIG1 w15: R12.2 99.1,1717.64 D7.1
NetQ1_1: Q1.1 R17.1 | length 122.7
  SIG2 w15: Q1.1 1308.59,3357.48 1325.27,3374.17 R17.1
NetR1_1: R1.1 R2.2 | length 101
  SIG1 w15: R1.1 R2.2
NetR2_1: R2.1 R3.2 | length 101
  SIG1 w15: R2.1 R3.2
NewNet1: J7.1 pad.Mount@96.21,103.91
  other v5: 100.2,105
NewNet2: J8.1 pad.Mount@105.08,1310.29
  other v5: 109.07,1311.38
PD0: D4.2 D8.1 J3.1 J6.1 pad.Pad@1189,3682 pad.Pad@1189.82,3544 U1.30 | length 1692.2
  SIG1 w6: U1.30 1189.82,3378.93 v3(1189.82,3578.85) pad.Pad@1189.51,3579.16 ; J6.1@1189,3682 J6.1@1189.51,3679.69 ; D4.2 1284.29,2645.76 1298.76,2645.76 v4(1331,2678)
  SIG1 w50: pad.Pad@1189.51,3579.16 J6.1@1189.51,3679.69
  SIG2 w6: v4(1331,2678) 1501,2848 1501,3409.15 1374.8,3535.35 D8.1
  SIG2 w15: v3(1189.82,3578.85) 1225.82,3542.85 D8.1
  other v3: 1189.2,3680
PD1: J3.2 J6.2 pad.Pad@1088.82,3544 pad.Pad@1090.29,3682 Q1.3 | length 280.7
  SIG1 w60: v3(1087.6,3680) 1088.22,3679.38 v3(1088.22,3578.85)
  SIG2 w15: v3(1088.22,3578.85) 1127.48,3539.6 1127.48,3487.51 1176.8,3438.19 Q1.3
PD1_protected: Q1.2 U1.31 | length 89.3
  SIG1 w6: U1.31 1074.32,3314.32 v4(1110,3350)
  SIG2 w6: v4(1110,3350) 1131.92,3350 Q1.2
PD2: J3.3 J6.3 pad.Pad@988.57,3682 pad.Pad@989.82,3548 U1.32 | length 406.6
  SIG1 w6: v3(986.62,3578.85) 986.62,3504.38 1087.6,3403.4 1087.6,3365.79 U1.32
  SIG1 w60: v3(986,3680) 986.62,3679.38 v3(986.62,3578.85)
PD3: J3.4 J6.4 pad.Pad@885.02,3548 pad.Pad@886.86,3682 U1.1 | length 386.9
  SIG1 w6: v3(885.02,3578.85) 885.02,3548 885.02,3419.33 U1.1
  SIG1 w60: v3(884.4,3680) 885.02,3679.38 v3(885.02,3578.85)
PD4: J3.5 J6.5 pad.Pad@783.42,3544 pad.Pad@785.14,3682 U1.2 | length 442
  SIG1 w6: v3(783.42,3578.85) 783.42,3544 783.42,3476.39 U1.2
  SIG1 w60: v3(782.8,3680) 783.42,3679.38 v3(783.42,3578.85)
PD5: J3.6 J6.6 pad.Pad@681.2,3544 pad.Pad@683.43,3682 U1.9 | length 750.2
  SIG1 w6: v1(770,3051.86) 814.54,3096.4 U1.9
  SIG1 w60: v3(681.2,3680) 681.82,3679.38 v3(681.82,3578.85)
  SIG2 w6: v3(681.82,3578.85) 681.82,3108.18 738.14,3051.86 v1(770,3051.86)
PD6: J3.7 J6.7 pad.Pad@580.22,3544 pad.Pad@581.71,3682 U1.10 | length 849.5
  SIG1 w6: v1(794,3029.59) 838.54,3074.13 U1.10
  SIG1 w60: v3(579.6,3680) 580.22,3679.38 v3(580.22,3578.85)
  SIG2 w6: v3(580.22,3578.85) 580.22,3483.78 656,3408 ; 655.13,3093 655.13,3408 ; 658.67,3091.83 726.67,3023.83 785.61,3023.83 791.37,3029.59 v1(794,3029.59)
PD7: J3.8 J6.8 pad.Pad@480,3682 pad.Pad@482.14,3544 U1.11 | length 954
  SIG1 w6: v1(817.22,3006.33) U1.11
  SIG1 w60: v3(478,3680) 478.62,3679.38 v3(478.62,3578.85)
  SIG2 w6: v3(478.62,3578.85) 478.62,3534.98 537.03,3476.57 538.43,3476.57 628.44,3386.56 628.44,3082.56 715.19,2995.81 802.91,2995.81 813.43,3006.33 v1(817.22,3006.33)
RESET: J4.1 M1.3 R3.1 U1.29 | length 888.7
  SIG1 w6: R3.1 301.89,2787.47 380,2709.36 380,2661 454,2587 M1.3 506,2587 557,2536 960.35,2536 J4.1
SCK: J4.2 U1.17 | length 411.5
  SIG1 w6: J4.2 969.08,2644.73 969.08,2769.08 1074.32,2874.32 1074.32,2913.26 1052.05,2935.53 U1.17
SW_node_1: C12.2 L1.1 U3.6 | length 224.9
  SIG1 w15: C12.2 380.78,761.84 420.75,721.87 U3.6
SW_node_2: C20.2 L2.1 U4.6 | length 103.3
  SIG1 w15: U4.6 526.07,1776.63 L2.1
XTAL1: C5.1 U1.7 Y1.2 | length 832.1
  SIG1 w6: C5.1 283.08,3413.39 304.08,3392.39 Y1.2 654.72,3382.37 U1.7
XTAL2: R4.1 R5.1 R6.1 U1.8 | length 699.2
  SIG1 w6: R4.1 550.69,2994.51 R5.1 550.51,2995.81 R6.1 550.51,3221.77 592.17,3263.43 729.12,3263.43 U1.8
XTAL2_res: C6.1 R4.2 R5.2 R6.2 Y1.1 | length 697.5
  SIG1 w6: C6.1 283.08,3133.99 304.08,3154.99 Y1.1 314.47,3151.98 R6.2 473.09,3151.42 R5.2 473.84,2994.51 R4.2
pads on no net: M1.1 U1.12 U1.13 U1.14 U1.19 U1.22 U1.23 U1.24 U1.25 U1.26 U1.27 U1.28
copper on no net:
  other v2: 1210.07,398.55 1073.66,402.12 1073.6,476.34 1210.07,476.34 1073.6,552.49 1210.66,552.49 599.49,1031.34 445.55,1031.93 523.34,1031.93 449.12,1168.34 523.34,1168.4 599.49,1168.4 1213.07,1644.55 1076.66,1648.12 1076.6,1722.34 1213.07,1722.34 1076.6,1798.49 1213.66,1798.49 1858.95,2260.42 1705,2261 1782.79,2261 439.51,2269.6 515.66,2269.6 589.88,2269.66 1708.57,2397.41 1782.79,2397.47 1858.95,2397.47 439.51,2406.66 515.66,2406.07 593.45,2406.07

## Polygon pours and split planes (outlines as drawn)
NewNet1 on SIG1 "NetC24_2_P" (solid, remove dead copper, pour order 25): 257.01,199.55 257.01,136.55 180.75,60.29 161.45,60.29 161.45,199.55
3V3_EN on SIG1 "SIG1-3V3_EN" (solid, remove dead copper, pour order 24): 98.99,258.64 320.75,258.64 320.75,583.69 287.16,617.29 287.16,675.43 207.14,755.45 124.52,755.45 124.52,486.29 222.63,486.29 222.63,393.98 187.14,393.98 187.14,360.6 98.99,360.6
3V3_smps on SIG1 "NetC24_2_P" (solid, remove dead copper, pour order 17): 1028.81,986.34 348.27,986.34 348.27,845.72 476.44,845.71 476.44,767.27 476.61,767.44 794.99,767.44 794.99,641.9 1025.99,641.9
SW_node_1 on SIG1 "NetC24_2_P" (solid, remove dead copper, pour order 18): 455.34,824.11 348.27,824.12 348.27,647.77 378.76,617.29 412.35,583.69 429.1,583.69 462.7,617.29 773.88,617.29 773.88,735.4 455.34,735.4
5V_smps on SIG1 "NetC24_2_P" (solid, remove dead copper, pour order 21): 1024.48,2207.32 571.99,2207.32 571.99,2078.89 367.92,2078.89 367.92,1928.89 1024.44,1928.89
5V0_EN on SIG1 "NetC24_2_P" (solid, remove dead copper, pour order 22): 449.06,1717.62 449.06,1451.2 377.93,1380.07 377.93,1311.74 224.69,1311.74 224.69,1477.45 57.49,1477.45 57.49,1590.91 322.58,1590.91 322.58,1717.62
SW_node_2 on SIG1 "NetC24_2_P" (solid, remove dead copper, pour order 23): 278.03,1885.88 322.84,1885.88 687.45,1885.88 687.45,1766.79 574.22,1766.79 533.8,1726.37 516.78,1726.37 476.36,1766.79 278.03,1766.79
no net on SIG1 "NetC24_2_P" (solid, remove dead copper, shelved, pour order 16): 1909.3,1993.72 2007.32,1993.72 2007.32,1807.28 1909.3,1807.28
no net on SIG1 "NetC24_2_P" (solid, remove dead copper, shelved, pour order 15): 1554.55,1319.21 1577.89,1295.87 1577.89,1192.73 1455.28,1192.73 1453.5,1190.96 1453.5,1318.28
XTAL1 on SIG1 "NetC24_2_P" (solid, remove dead copper, shelved, pour order 2): 785.79,1480.98 836.2,1430.57 836.2,1239.67 328.7,1239.67 328.7,1307.91 501.77,1480.98
no net on SIG1 "NetC24_2_P" (solid, remove dead copper, shelved, pour order 13): 1824.38,791.59 1882.55,849.76 1890.04,852.58 1952.68,852.58 1952.68,695.51 1911.43,695.51 1831.25,615.34 1831.25,600.22 1789.53,558.5 1737.56,558.5 1700.71,595.35 1700.71,687.55 1781.33,687.55 1824.38,730.6
no net on SIG1 "NetC24_2_P" (solid, remove dead copper, shelved, pour order 10): 2245.23,1083.35 2098.58,1083.35 2098.58,820.05 2245.23,820.05
no net on SIG1 "NetC24_2_P" (solid, remove dead copper, shelved, pour order 9): 1907.56,1633.29 1921.73,1619.13 1921.73,1515.69 1952.56,1485.87 2153.69,1485.87 2153.69,1750.38 1934.78,1750.38 1907.56,1750.38
no net on SIG1 "NetC24_2_P" (solid, remove dead copper, shelved, pour order 11): 1603.26,887.05 1561.6,845.39 1512.57,845.39 1512.57,705.79 1753.44,705.79 1799.09,751.44 1799.09,1149.16 1648.88,1149.16 1648.88,1019.23 1603.26,973.61
no net on SIG1 "NetC24_2_P" (solid, remove dead copper, shelved, pour order 12): 1453.5,988.13 1466.12,972.51 1512.03,972.51 1569.02,972.51 1633.89,1037.38 1633.89,1150.59 1518.27,1150.34 1492.54,1124.61 1492.54,1096.42 1453.5,1096.42
no net on SIG1 "NetC24_2_P" (solid, remove dead copper, shelved, pour order 8): 1627.78,1401.17 1627.78,1322.95 1679.48,1271.25 2065.11,1271.25 2065.11,1125.27 2317.63,1125.27 2317.63,1287 2238.94,1365.69 2238.94,1386.83 2239.48,1411.78 2218.25,1433.01 1811.27,1433.01 1769.04,1475.23 1699.35,1401.17
no net on SIG1 "NetC24_2_P" (solid, remove dead copper, shelved, pour order 7): 847.88,1697.13 620.81,1697.13 620.81,1618.53 847.88,1618.53
no net on SIG1 "NetC24_2_P" (solid, remove dead copper, shelved, pour order 6): 1355.45,1553.57 1355.45,1644.12 1150.53,1644.12 1150.53,1553.57
no net on SIG1 "NetC24_2_P" (solid, remove dead copper, shelved, pour order 5): 1060.34,1404.3 869.3,1404.3 869.27,1404.28 871.04,1402.51 871.04,1223.25 1312.76,1223.25 1312.76,1456.84 1060.34,1456.84
12Vin on SIG1 "NetC24_2_P" (solid, remove dead copper, shelved, pour order 4): 922.02,1020.81 921.44,1021.4 749.33,1021.4 749.33,718.84 922.02,718.84
NetC22_2 on SIG1 "NetC24_2_P" (solid, remove dead copper, shelved, pour order 3): 1024.34,935.84 978.34,935.84 978.34,1031.34 978.34,1125.84 1313.61,1125.84 1313.61,1020.81 1024.34,1020.81
12Vin on SIG1 "NetC24_2_P" (solid, remove dead copper, shelved, pour order 1): 381.21,1044.34 225.31,1044.34 225.31,753 381.21,753
SW_node_1 on SIG1 "NetC24_2_P" (solid, remove dead copper, shelved, pour order 0): 839,1157.86 839,1044.34 489.74,1044.34 489.74,959.24 439.57,959.24 439.57,1157.81
GND on SIG2 "NetC24_2_P" (solid, remove dead copper, shelved, pour order 14): 13,2766 13,8 2566,8 2566,2766

## Silkscreen, mask and mechanical layers (free items; w line width, h text height)
Top Overlay:
  lines w6: 2959.26,1233.39 2959.26,1232.28 ccw(c2959.26,1233.39) 2960.36,1233.39
Bottom Overlay:
  text "1/8'' / 3mm" at 2253.52,282.31 h40
Top Solder:
  rectangle: 3736,492 3869,576
Board:
  lines w39.37: 0,8 0,3943.85
  lines w47.24: 0,3943.84 3935.5,3943.84 3935.5,8 4,8
Top 3D Body:
  lines w0.98: 2857.53,639.46 2937.36,639.46
v-scores:
  lines w6: 324.15,2437.84 0,2437.84 0,3943.85 435.99,3943.85 435.99,3680 1236,3680 1236.19,3943.85 3935.5,3943.85 3935.5,8 1239,8 1239,286 ; 326,2241 0,2241 0,1203.84 330.15,1203.84 ; 332,1007 0,1007 0,8 1042.16,8 1042.16,284.15 ; 705.27,2432.31 1041.13,2432.31 1247.43,2432.31 ; 710,2235.57 1050.69,2235.57 1050.69,1910.27 ; 711.27,1198.31 1047.13,1198.31 ; 716,1001.57 1047.13,1001.57 ; 1045.16,1199 1045.16,1529.15 ; 1047.69,665.27 1047.69,1001.13 ; 1242,1531 1242,1199 1244.43,1001.13 1244.43,670 ; 1247.43,1915 1247.43,2234.76 1593.18,2234.76 ; 1247.77,2431.5 1588.45,2431.5
  lines w10: 324.15,2437.84 cw(c325.13,2339.42) 326,2241 ; 330.15,1203.84 cw(c331.13,1105.42) 332,1007 ; 705.27,2432.31 ccw(c710,2334) 710,2235.57 ; 711.27,1198.31 ccw(c716,1100) 716,1001.57 ; 1042.16,284.15 cw(c1140.58,285.13) 1239,286 ; 1045.16,1529.15 cw(c1143.58,1530.13) 1242,1531 ; 1047.69,665.27 ccw(c1146,670) 1244.43,670 ; 1050.69,1910.27 ccw(c1149,1915) 1247.43,1915 ; 1588.45,2431.5 cw(c1588.45,2333.07) 1593.18,2234.76

## Dimensions
-2,11 to 3936,26 on Bottom Courtyard
-278,3934 to -255,3 on Bottom Courtyard
3918,-2 to 2776,2 on Bottom Courtyard
3947,1691 to 3947,10 on Bottom Courtyard
-21,987 to -17,20 on Bottom Courtyard
1044,-218 to 6,-218 on Bottom Courtyard
2127,-218 to 1064,-212 on Bottom Courtyard
-256,-13.29 to -261,2775.71 on Dimensions
-3,-74 to 2635,-74 on Dimensions